# Altium PCB PCB1.PcbDoc
Units mm, origin at the board's own origin, x right, y up, seen from the top; angles counter-clockwise.
Board outline 70.74 x 78.23 mm, 2 copper layers (Top Layer, Bottom Layer); 37 components, 32 nets, 166 pads, 23 vias.
Unrouted connection lines stored in the file: 7.
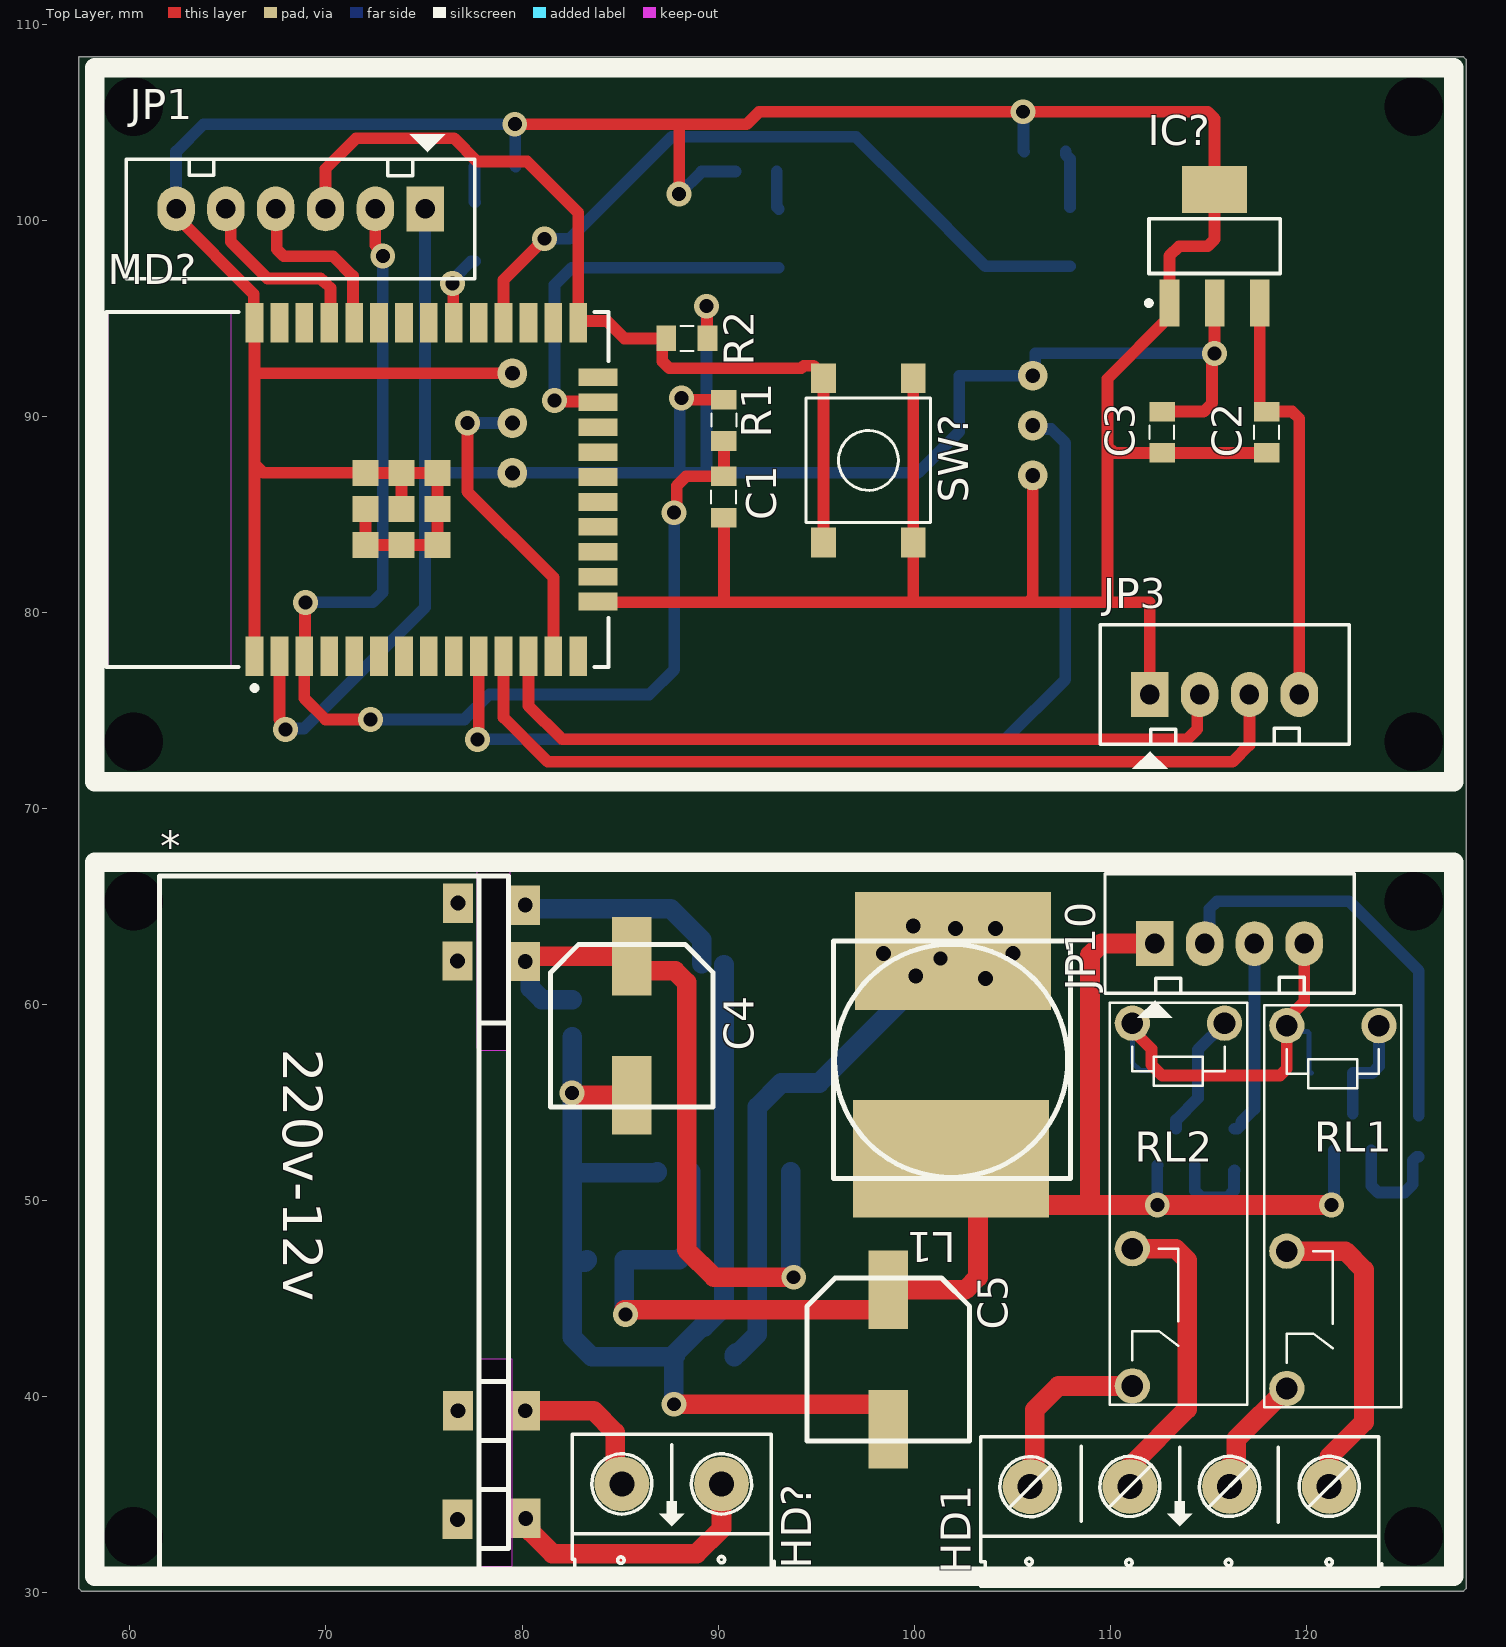
[diagram p0: Top Layer view]
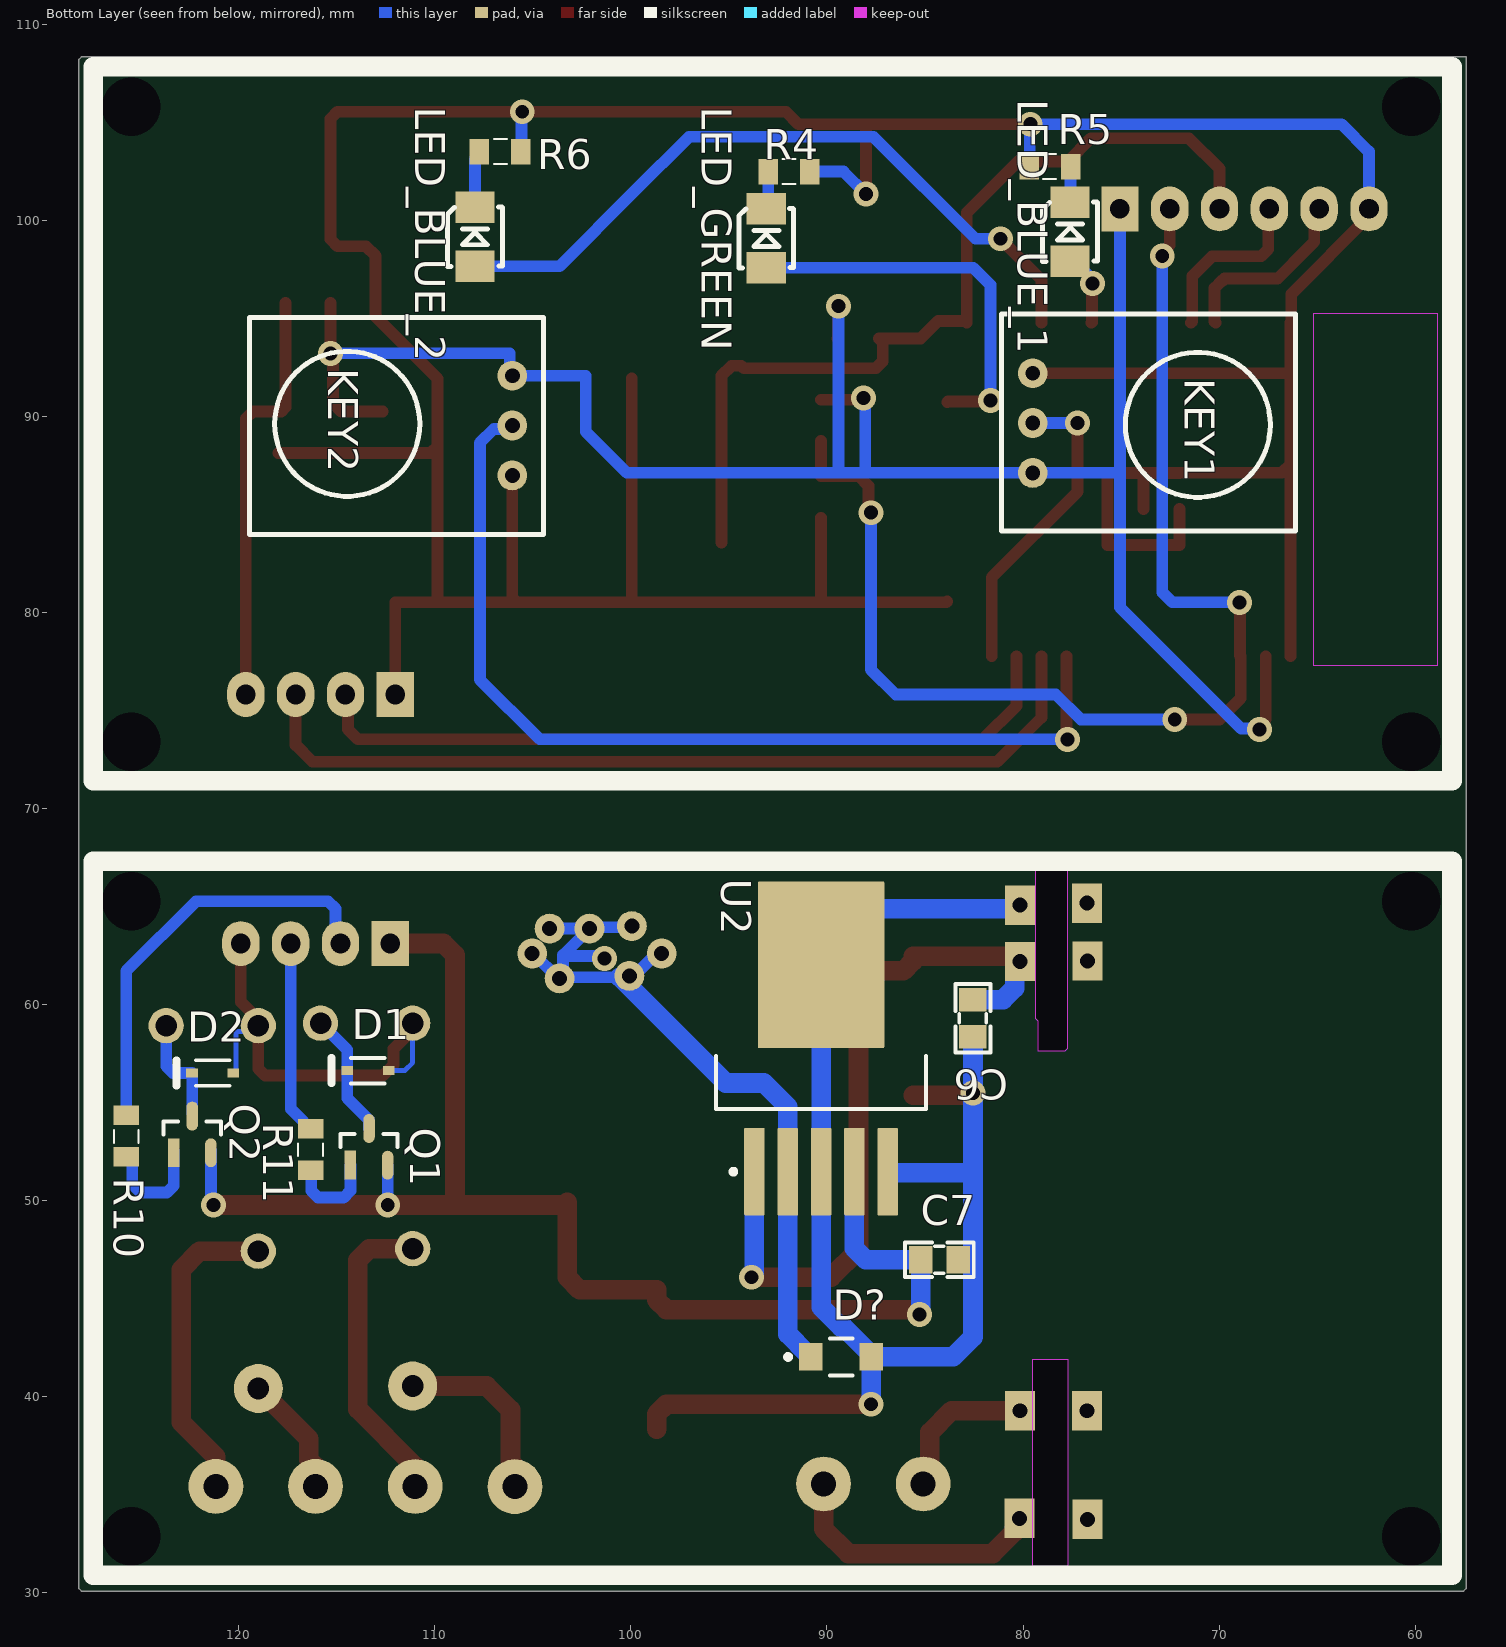
[diagram p1: Bottom Layer view, seen from below]
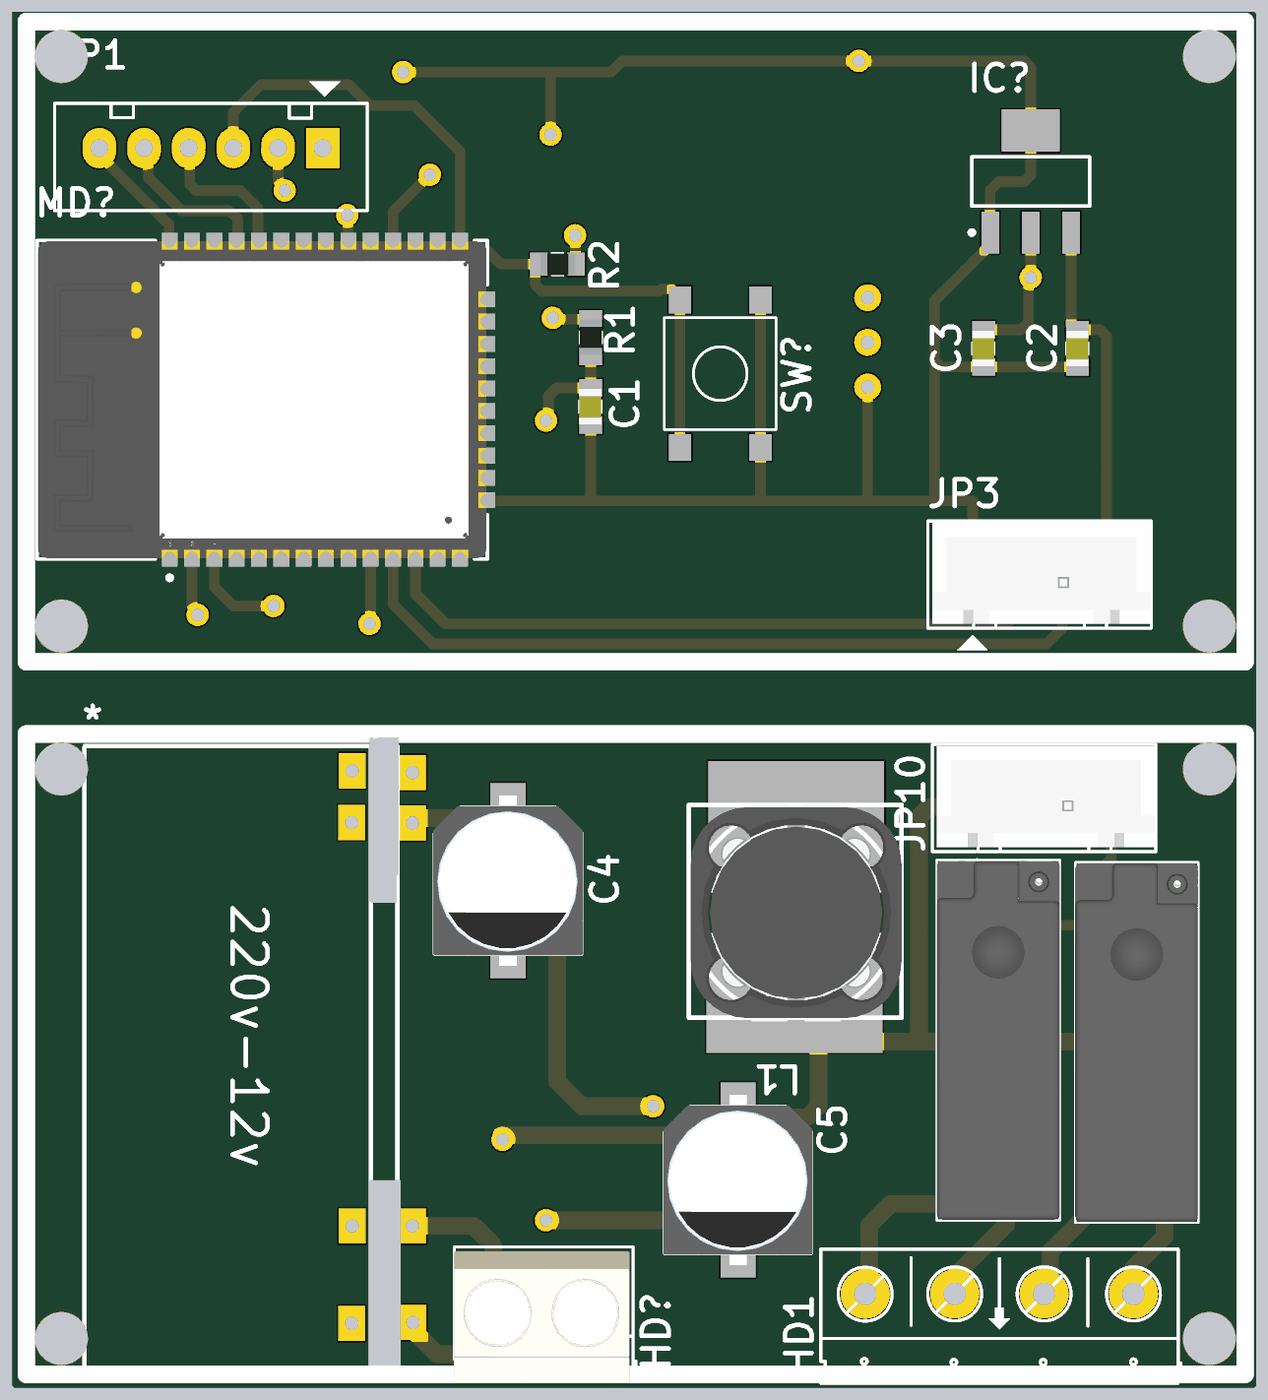
[diagram p2: 3D render of the assembled board from above, using the file's embedded part models]
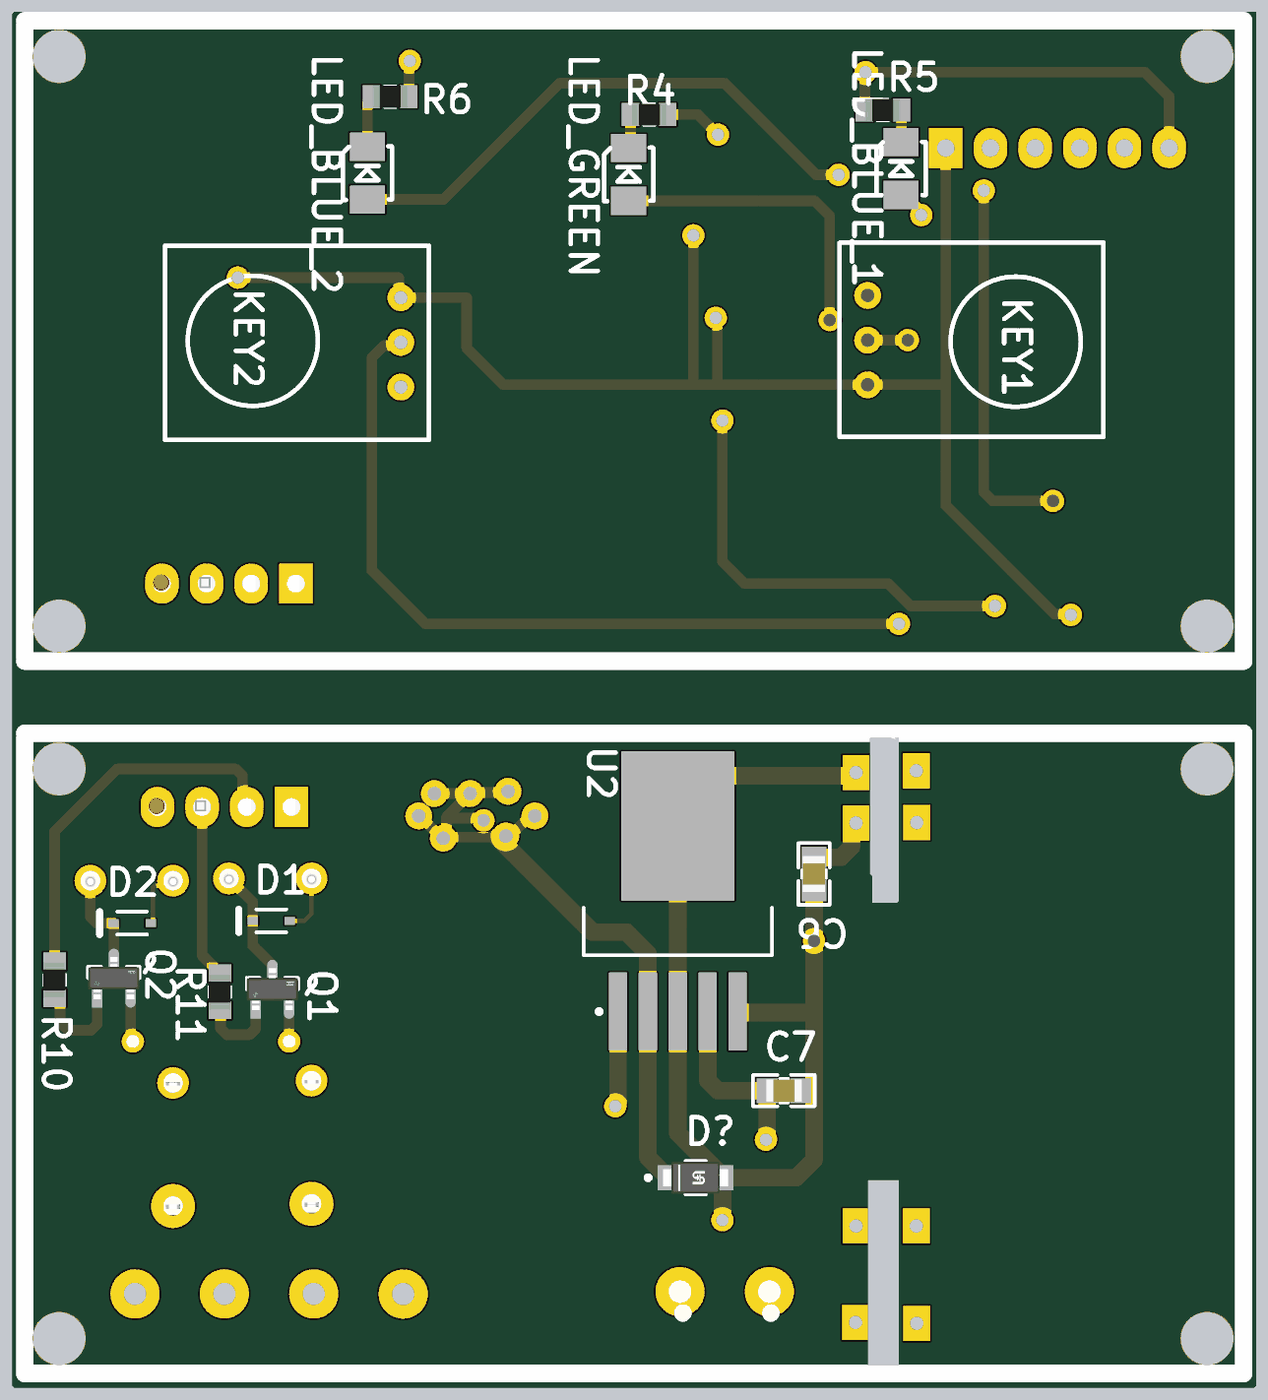
[diagram p3: 3D render of the assembled board from below, using the file's embedded part models]

## Layer stack, top to bottom
Top Solder: solder mask 0.0102, Solder Resist, Dk 3.5
Top Layer: signal copper 0.0356
Dielectric 1: dielectric 0.32, FR-4, Dk 4.8
Bottom Layer: signal copper 0.0356
Bottom Solder: solder mask 0.0102, Solder Resist, Dk 3.5

## Board outline
57.404,30.226 57.531,30.099 128.016,30.099 128.143,30.226 128.143,108.204 128.016,108.331 57.404,108.331
cut-out: 77.851,66.929 77.978,67.056 79.375,67.056 79.375,59.309 79.248,59.182 79.248,57.658 77.851,57.658 77.724,57.785 77.724,67.056 78.232,67.056
cut-out: 77.724,41.91 77.724,31.369 79.502,31.369 79.502,41.91

## Design rules (kind name [scope] priority, off if disabled: settings)
Clearance [All] p1: gap=0.254 ignorepadtopadclearanceinfootprint=FALSE except(0: Arc-Hole Track-Hole SMDPad-Hole THPad-Hole Via-Hole Fill-Hole Poly-Hole Region-Hole Text-Hole)
PolygonConnect [All] p1: connectstyle=Relief reliefconductorwidth=0.254 reliefentries=4 polygonreliefangle="90 Angle" airgapwidth=0.254
RoutingVias [All] p1: holewidth=0.711 width=1.27 viastyle="Through Hole" minholewidth=0.711 minwidth=1.27 maxholewidth=0.711 maxwidth=1.27
SolderMaskExpansion [All] p1: expansion=0.102 istentingtop=FALSE
Width [All] p1: maxlimit=1 minlimit=0.254 preferedwidth=0.6
30 further rules are at their usual default settings.

## Classes and differential pairs
component class Mat_tren: C1 C2 C3 IC? JP1 JP3 KEY1 KEY2 LED_BLUE_1 LED_BLUE_2 LED_GREEN MD? R1 R2 R4 R5 R6 SW?
component class Mat_Duoi: * C4 C5 C6 C7 D1 D2 D? HD1 HD? JP10 L1 Q1 Q2 R10 R11 RL1 RL2 U2

## Components (designator, comment, footprint, x,y, rotation, side; value= is the part's Value field where it differs from the comment)
* "MODULE_NGUON" NGUON_220_12 77.724,66.599 r270 top
C1 "1uF" CM-0805 90.297,85.877 r90 top value=103
C2 "104" CM-0805 117.983,89.179 r90 top value=103
C3 "104" CM-0805 112.649,89.179 r90 top value=103
C4 "470uF" "tu nhom 8 (f)" 85.598,58.928 r270 top
C5 "470uF" "tu nhom 8 (f)" 98.679,41.91 r270 top
C6 "104" "tu 0805" 82.55,59.309 r270 bottom
C7 "104" "tu 0805" 84.266,46.993 r180 bottom
D1 "1N4148WS-7-F" DIOD-SOD323-2-A_V 113.411,56.642 r0 bottom
D2 "1N4148WS-7-F" DIOD-SOD323-2-A_V 121.324,56.515 r0 bottom
D? "SS34LWHRVG" FP-SS34LWH-MFG 89.281,42.037 r180 bottom
HD1 "Header 4" HED4 121.16,35.435 r180 top
HD? "Header 2" HED2 90.17,35.56 r180 top
IC? "LM1117" SOT223-4N 115.316,98.679 r90 top value=LM317
JP1 "JP6" CON6 75.057,100.584 r180 top value="Connector 6"
JP3 "JP4" CON4 112.014,75.819 r0 top value="Connector 4"
JP10 "JP4" CON4 112.268,63.119 r0 top value="Connector 4"
KEY1 "Component_1" test 81.169,95.186 r180 bottom
KEY2 "Component_1" test 104.378,84.01 r0 bottom
L1 "100uH - 3A SMD" "Cuon Cam 12x12x10" 95.881,51.138 r0 top
LED_BLUE_1 "LED" LED_SMD 77.597,97.917 r90 bottom value="LED 3 ly Single Colour"
LED_BLUE_2 "LED" LED_SMD 107.95,97.663 r90 bottom value="LED 3 ly Single Colour"
LED_GREEN "LED" LED_SMD 93.091,97.584 r90 bottom value="LED 3 ly Single Colour"
MD? "ESP32-WROOM-32" FP-ESP32-WROOM-32-MFG 71.617,86.274 r90 top
Q1 "MMSS8550-H-TP" FP-SOT-23-IPC_B 113.35,52.751 r90 bottom
Q2 "MMSS8550-H-TP" FP-SOT-23-IPC_B 122.367,53.386 r90 bottom
R1 "10k" RM-0805 90.297,89.789 r90 top value="R1/4W - 1K"
R2 "10k" RM-0805 88.392,93.98 r0 top value="R1/4W - 1K"
R4 "1k" RM-0805 91.948,102.489 r180 bottom value="R1/4W - 1K"
R5 "1k" RM-0805 78.613,102.743 r0 bottom value="R1/4W - 1K"
R6 "1k" RM-0805 106.68,103.505 r180 bottom value="R1/4W - 1K"
R10 "1k" RM-0805 125.73,53.315 r270 bottom value="R1/4W - 1K"
R11 "1k" RM-0805 116.332,52.629 r270 bottom value="R1/4W - 1K"
RL1 "Relay" HF46F 118.998,58.928 r270 top value="Relay SPDT, 10A, 12V"
RL2 "Relay" HF46F 111.124,59.055 r270 top value="Relay SPDT, 10A, 12V"
SW? "SW" SW4_SMD 97.663,87.757 r270 top value="Button chip 4 pin"
U2 "LM2596S-3.3/NOPB" KTT0005B_M 90.297,57.785 r90 bottom

## Footprints (in the part's own frame and the unit in brackets; to place one, negate y for a bottom-side part, rotate by r counter-clockwise, add the part's x,y. Pads: shape width x height; smd on the part's side, far side on the other; paste and mask are expansions set on the pad)
CM-0805 [mm] "Capacitor SMD 80x50mil"
  rect 1x1.3 smd: 1(-1.041,0) 2(1.067,0)
  silkscreen extent -0.33,-0.61 0.36,0.66, body extent -1.01,-0.61 1.01,0.66, height 0.61
CON4 [mm] "CON4 - Header White"
  rect 1.905x2.286 hole 1: 1(0,0)
  oval 1.905x2.286 hole 1: 2(2.54,0) 3(5.08,0) 4(7.62,0)
  silkscreen extent -2.54,-3.8 10.16,3.56, body extent -2.29,-2.29 10.11,3.46, height 7
CON6 [mm] "CON6"
  rect 1.905x2.286 hole 1: 1(0,0)
  oval 1.905x2.286 hole 1: 2(2.54,0) 3(5.08,0) 4(7.62,0) 5(10.16,0) 6(12.7,0)
  silkscreen extent -2.54,-3.8 15.24,3.56
"Cuon Cam 12x12x10" [mm] "Cuon Cam 12x12x10"
  rect 10x6 smd: 1(6.1,11.6) 2(6,1)
  silkscreen extent 0,0 12.1,12.1, body extent 0.1,-0.2 12.1,12.14, height 7.51
DIOD-SOD323-2-A_V [mm] "SOD-323, 2-Leads, Body 1.7x1.3mm"
  rect 0.59x0.45 smd: 1(-1.055,0) 2(1.055,0)
  silkscreen extent -0.85,-0.65 1.85,0.65, body extent -0.85,-0.65 0.85,0.65, height 1.2
FP-ESP32-WROOM-32-MFG [mm]
  rect 2x0.9 smd paste+0 mask+0: 1(-8.5,5.26) 2(-8.5,3.99) 3(-8.5,2.72) 4(-8.5,1.45) 5(-8.5,0.18) 6(-8.5,-1.09) 7(-8.5,-2.36) 8(-8.5,-3.63) 9(-8.5,-4.9) 10(-8.5,-6.17) 11(-8.5,-7.44) 12(-8.5,-8.71) 13(-8.5,-9.98) 14(-8.5,-11.25) 25(8.5,-11.25) 26(8.5,-9.98) 27(8.5,-8.71) 28(8.5,-7.44) 29(8.5,-6.17) 30(8.5,-4.9) 31(8.5,-3.63) 32(8.5,-2.36) 33(8.5,-1.09) 34(8.5,0.18) 35(8.5,1.45) 36(8.5,2.72) 37(8.5,3.99) 38(8.5,5.26)
  rect 0.9x2 smd paste+0 mask+0: 15(-5.715,-12.25) 16(-4.445,-12.25) 17(-3.175,-12.25) 18(-1.905,-12.25) 19(-0.635,-12.25) 20(0.635,-12.25) 21(1.905,-12.25) 22(3.175,-12.25) 23(4.445,-12.25) 24(5.715,-12.25)
  rect 1.33x1.33 smd paste+0 mask+0: 39(-2.835,-2.24) 39(-2.835,-0.405) 39(-2.835,-4.075) 39(-1,-0.405) 39(-1,-4.075) 39(-1,-2.24) 39(0.835,-0.405) 39(0.835,-4.075) 39(0.835,-2.24)
  Keep-Out Layer region: -9,6.45 9,6.45 9,12.75 -9,12.75
  Keep-Out Layer region: -9,6.45 9,6.45 9,12.75 -9,12.75
  silkscreen extent -10.25,-12.8 9.05,12.8, body extent -9.6,-13.35 9.6,12.9, height 0.25
FP-SOT-23-IPC_B [mm]
  rect 1.474x0.585 smd paste+0 mask+0: 1(-0.935,0.95)
  rrect100% 1.474x0.585 smd paste+0 mask+0: 2(-0.935,-0.95) 3(0.935,0)
  silkscreen extent 0,-1.46 0.65,1.46, body extent -1.2,-1.46 1.2,1.46, height 1.25
FP-SS34LWH-MFG [mm]
  rect 1.2x1.4 smd paste+0 mask+0: 1(-1.55,0) 2(1.55,0)
  silkscreen extent -2.83,-0.95 0.58,0.95, body extent -1.85,-0.9 1.85,0.9, height 1.02
HED2 [mil] "Header 2, 2 pin, hight 300mil, Pin to Pin 200, Colour Green"
  round 110 hole 50: 1(0,0) 2(200,0)
  silkscreen extent -106,-100 300,200, body extent -92,-90 302,205, height 394
HED4 [mil] "Header 4, 4 pin, hight 300mil, Pin to Pin 200, Colour Green"
  round 110 hole 50: 1(0,0) 2(200,0) 3(400.06,0.06) 4(600.39,0.39)
  silkscreen extent -106,-100 700,200
HF46F [mm]
  round 1.8 hole 1.1: 1(0,0) 2(0,4.7) 3(11.5,0)
  round 1.8 / inner round 1.8 / far side round 2.5 hole 1.1: 4(18.5,0)
  silkscreen extent -1.05,-1.15 19.45,5.85, body extent -1,-1.15 19.4,5.85, height 15.59
KTT0005B_M [mm] "DPAK, 5-Leads, Body 10.65x9.65mm, Pitch 1.7mm, IPC Low Density"
  rrect10% 4.45x1.05 smd: 1(-6.3,3.4) 2(-6.3,1.7) 3(-6.3,0) 4(-6.3,-1.7) 5(-6.3,-3.4)
  rrect2% 8.5x6.45 smd: 6(4.25,0)
  silkscreen extent -6.42,-5.35 -0.4,5.35, body extent -3.1,-5.32 6.55,5.33, height 4.83
LED_SMD [mm]
  rect 1.6x2 smd: 1(0,0) 2(3,0)
  silkscreen extent -0.03,-1.4 3.02,1.4
NGUON_220_12 [mil]
  rect 78.74x60 hole 30: 1(56,-39) 1(60,96) 2(172,-40) 2(173,96) 3(1075,-39) 3(1075,96) 4(1291,97) 4(1293,-40)
  silkscreen extent 1,-638 1410,62
RM-0805 [mm] "Resistor SMD 80x50mil"
  rect 1x1.3 smd: 1(-1.041,0) 2(1.067,0)
  silkscreen extent -0.3,-0.64 0.36,0.64, body extent -0.97,-0.64 1.03,0.62, height 0.58
SOT223-4N [mm] "SOT223, 4-Leads, Body 6.5x3.5mm, Pitch 2.3mm, Lead Span 7mm, IPC Medium Density"
  rect 2.4x1 smd: 1(-2.9,2.3) 2(-2.9,0) 3(-2.9,-2.3)
  rect 2.4x3.3 smd: 4(2.9,0)
  silkscreen extent -3.02,-3.35 1.4,3.47, body extent -1.85,-3.35 1.85,3.35, height 1.8
SW4_SMD [mil] "SW SMD button 4pin, 250 x250 mil"
  rect 60x50 smd: 1(-165,90) 2(165,-90) 3(165,90) 4(-165,-90)
  silkscreen extent -125,-125 125,125, body extent -180,-125 180,125, height 130
test [mil]
  round 60 hole 30: 1(65.63,-317.5) 2(65.63,-217.5) 3(65.63,-117.5)
  silkscreen extent 3,-434 594,1
"tu 0805" [mm] "Compoment SMD 80x50mil"
  rect 1.2x1.4 smd: 1(-0.946,-0.003) 2(0.954,-0.003)
  silkscreen extent -1.75,-0.89 1.75,0.89, body extent -1.01,-0.64 1.01,0.63, height 0.61
"tu nhom 8 (f)" [mm]
  rect 4x2 smd: 1(-3.55,0) 2(3.55,0)
  silkscreen extent -4.15,-4.15 4.15,4.15, body extent -4.85,-4.25 4.85,4.25, height 10.5

## Part data
C1 C2 C3: library part CM, "Cap SMD"
C4 C5: library part "Tu Nhom 470uF 16V", "Dán", Chung_Loai=Dán, Don_Vi=Con, Ma_Hang=MH001940, So_Chan=2, Ten_Linh_Kien="Tụ Nhôm 470uF 16V 8x10.4MM"
C6 C7: library part "Tu 0805 104 50V 10%", "Dán", Chung_Loai=Dán, Don_Vi=Con, Ma_Hang=MH004551, So_Chan=2, Ten_Linh_Kien="Tụ 0805 104-100nF 10% 50V"
D1 D2: library part CMP-1667-00004-1, "Fast Switching Diode, 75 V, 0.3 A, -65 to 150 degC, 2-Pin SOD323, RoHS, Tape and Reel", ComponentLink1Description="Manufacturer URL", ComponentLink1URL=http://www.diodes.com/, ComponentLink2Description=Datasheet, ComponentLink2URL=http://www.diodes.com/datasheets/ds30097.pdf, DatasheetVersion="Rev. 25-2, 03/2016", PackageDescription="2-Pin Small Outline Diode, Body 1.7 x 1.3 mm", PackageReference=SOD323-2
D?: library part CMP-15604-000001-1, "DIODE SCHOTTKY 40V 3A SOD123W", RoHS Compliant=Yes
HD1: library part Hed4, "Header 4 (Green)"
HD?: library part Hed2, "Header 2 (Green)"
IC?: "3v3"
JP1: library part Con6, "Connector 6"
JP3 JP10: library part Con4, "Connector 4"
L1: library part "CUON CAM 100uH SMD", "Dán", Chung_Loai=Dán, Don_Vi=Con, Ten_Linh_Kien="Cuộn Cảm 100uH 7x7x4MM CD74"
LED_BLUE_1 LED_BLUE_2 LED_GREEN: "LED Single colour Green and Red"
MD?: library part CMP-194065-000008-1, "RX TXRX MOD WIFI SURFACE MOUNT", Case/Package=SMD/SMT, Frequency=2.5GHz, Max Operating Temperature=85°C, Min Operating Temperature=-40°C, Operating Supply Voltage=3.6V, Package Quantity=550, Data Rate=150Mbps, Mount="Surface Mount", Packaging="Cut Tape", Sensitivity=-98dBm, Weight=0.088185oz
Q1 Q2: library part CMP-56214-000002-1, "TRANS PNP 25V 1.5A SOT23", Case/Package=SOT-23, Collector Base Voltage (VCBO)=40V, Collector Emitter Breakdown Voltage=25V, Collector Emitter Saturation Voltage=500mV, Emitter Base Voltage (VEBO)=1.6V, Max Collector Current=1.5A, Max Operating Temperature=150°C, Max Power Dissipation=625mW, Min Operating Temperature=-55°C, Package Quantity=1, Transition Frequency=100MHz, Collector Emitter Voltage (VCEO)=500mV, Element Configuration=Single, Gain Bandwidth Product=100MHz, hFE Min=40, Lead Free="Lead Free", Max Breakdown Voltage=25V, Mount="Surface Mount", Packaging="Tape and Reel", Polarity=PNP
R1 R2 R4 R5 R6 R10 R11: library part R, "Resistor 1/4W"
RL1 RL2: library part "Relay SPST-NO", "Relay SPDT 4 Pin, HF161F-W or G4A-1A-PE"
SW?: library part SW4, "Switch button 4 pin"
U2: library part CMP-0069-00275-3, "SIMPLE SWITCHER® Power Converter 150 KHz 3A Step-Down Voltage Regulator, 5-pin TO-263, Pb-Free", Manufacturer="Texas Instruments", PackageTopMarking="NSUZXYTTE#*LM2596S*-3.3 P+", PowerWise=N, Code_JEDEC=MO-169-AB, ComponentLink1Description="Datasheet URL", ComponentLink1URL=http://www.ti.com/general/docs/lit/getliterature.tsp?genericPartNumber=LM2596&fileType=pdf, CompType=Switcher, PackageDescription="TO-263, Molded, .400 x .390 x .180in, 5 Lead, .067in Pitch, Surface Mount", PackageReference=KTT0005B, PinCount=5, RoHS=Y

## Free pads (board coordinates)
  round 1.524 hole 3: 31(60.198,32.893) 31(60.198,65.278) 31(60.198,73.406) 31(60.198,105.791) 31(125.476,32.893) 31(125.476,65.278) 31(125.476,73.406) 31(125.476,105.791)
  round 1.524 hole 0.762: 32(99.949,64.008) 33(102.108,63.881) 34(104.14,63.881) 35(105.029,62.611) 36(103.632,61.341) 37(100.076,61.468) 38(98.425,62.611)

## Via types
v1: diameter 1.27, hole 0.711, Top Layer to Bottom Layer, 23 vias

## Nets (pads, with @x,y where several pads share a name; then routed paths per layer and width w, separated by ;. In a path a pad name is that pad's centre, name@x,y a point inside that pad or via, vN(x,y) a via of type N, cw(c..) or ccw(c..) an arc to the next point about the centre after c; other vN are vias at no path point)
3.3V: C3.2 IC?.2 JP1.1 KEY1.1 KEY2.1 MD?.2 R1.2 R2.2 | length 102.5
  Top Layer w0.6: v1@67.627,74.54 MD?.2 ; v1(88.138,90.932) 88.214,90.856 R1.2 ; v1(89.408,95.62) 89.433,95.595 89.433,94.005 R2.2 ; C3.2 114.757,90.246 115.189,90.678 115.189,93.091 v1(115.316,93.218) IC?.2
  Bottom Layer w0.6: v1(67.945,74.041) 67.986,74.082 68.875,74.082 75.057,80.264 75.057,87.249 ; JP1.1 75.057,87.249 ; 88.041,87.122 88.041,90.835 v1(88.138,90.932) ; v1(89.408,95.62) 89.408,87.249 89.535,87.122 ; v1(115.316,93.218) 106.172,93.218 106.172,92.202 KEY2.1 102.298,92.075 102.298,89.218 100.203,87.122 89.535,87.122 ; 75.057,87.249 75.184,87.122 KEY1.1 87.66,87.122 88.519,87.122 89.535,87.122
5V: C2.2 C5.1 C7.1 IC?.3 JP3.4 JP10.1 L1.2 Q1.2 Q2.2 U2.4 | length 94.9
  Top Layer w0.6: IC?.3 117.616,90.463 117.833,90.246 119.283,90.246 119.634,89.895 JP3.4
  Top Layer w1: v1@85.217,44.45 98.179,44.45 98.679,44.95 C5.1 102.61,45.46 103.251,46.101 103.251,49.911 103.378,49.784 108.966,49.784 ; JP10.1 109.552,63.119 108.966,62.533 108.966,49.784 ; v1(121.285,49.784) v1(112.395,49.784) 108.966,49.784
  Bottom Layer w0.6: v1(112.395,49.784) 112.397,49.786 112.397,51.814 Q1.2 ; v1(121.285,49.784) 121.404,49.903 121.404,52.57 Q2.2@121.412,52.578
  Bottom Layer w1: v1(85.282,44.199) 85.282,44.272 85.215,44.34 85.215,46.987 C7.1 88.011,46.99 88.597,47.576 U2.4 ; JP10.1@111.816,62.543 112.268,62.995 JP10.1
+12: *.2 C4.1 C6.1 U2.1 | length 37.6
  Top Layer w1: *.2@80.424,62.478 C4.1 85.598,62.222 86.098,61.722 87.806,61.722 88.392,61.136 88.392,47.498 89.789,46.101 v1(93.853,46.101)
  Bottom Layer w1: *.2@80.162,62.205 80.424,61.943 80.424,60.84 81.01,60.255 C6.1 ; U2.1 93.697,46.33 93.853,46.174 v1(93.853,46.101)
\: JP10.3 R11.1 | length 10
  Bottom Layer w0.6: R11.1 116.482,53.67 116.682,53.87 116.682,54.02 117.348,54.686 JP10.3
BTN1: KEY1.2 MD?.13 | length 16
  Top Layer w0.6: v1(77.216,89.662) 77.216,86.168 81.597,81.787 MD?.13
  Bottom Layer w0.6: v1(77.216,89.662) KEY1.2
BTN2: KEY2.2 MD?.10 | length 49.6
  Top Layer w0.6: v1(77.724,73.533) 77.787,73.596 MD?.10
  Bottom Layer w0.6: v1(77.724,73.533) 104.648,73.533 107.696,76.581 107.696,88.646 106.984,89.358 106.222,89.358 KEY2.2
COM_1: HD1.1 RL1.3 | length 15.1
  Top Layer w1: RL1.3 121.99,47.428 122.936,46.482 122.936,38.712 121.158,36.934 HD1.1@121.158,36.449
COM_2: HD1.3 RL2.3 | length 14.8
  Top Layer w1: HD1.3@110.996,36.447 113.919,39.37 113.919,46.969 113.333,47.555 RL2.3
EN: C1.2 JP1.2 MD?.3 R1.1 | length 63
  Top Layer w0.6: v1(68.961,80.518) 68.929,80.486 68.929,77.806 MD?.3 68.897,75.629 69.977,74.549 v1(72.263,74.549) ; JP1.2 72.517,98.733 72.898,98.352 v1(72.898,98.171) ; v1(87.757,85.09) 87.885,85.218 87.885,86.467 88.362,86.944 C1.2 R1.1
  Bottom Layer w0.6: v1(68.961,80.518) 72.39,80.518 72.898,81.026 v1(72.898,98.171) ; v1(72.263,74.549) 77.059,74.549 78.329,75.819 86.487,75.819 87.757,77.089 v1(87.757,85.09)
FLASH: JP1.3 MD?.25 R2.1 SW?.2 SW?.4 | length 46.1
  Top Layer w0.6: JP1.3 69.977,102.627 71.536,104.186 76.535,104.186 77.724,102.997 80.264,102.997 82.867,100.394 MD?.25 82.962,94.869 84.328,94.869 85.217,93.98 R2.1 87.151,93.78 87.151,92.807 87.502,92.456 94.234,92.456 94.366,92.588 94.864,92.588 95.377,92.075 SW?.4 SW?.2
GND: *.1 C1.1 C2.1 C3.1 C4.2 C5.2 C6.2 C7.2 D1.1 D2.1 D?.2 IC?.1 IC?.4 JP1.6 JP3.1 JP10.4 KEY1.3 KEY2.3 MD?.1 MD?.15 MD?.38 MD?.39 R4.2 R5.2 R6.2 RL1.1 RL2.1 SW?.1 SW?.3 U2.3 U2.5 U2.6 | length 316.1
  Top Layer w0.6: JP1.6 62.357,100.203 66.323,96.237 66.323,94.808 MD?.38 66.357,92.329 ; MD?.1 66.357,87.567 ; MD?.39@72.022,85.274 72.022,83.439 73.857,83.439 75.692,83.439 75.692,85.274 75.692,87.109 MD?.39@73.857,87.109 ; MD?.39@73.857,85.274 MD?.39@73.857,87.109 ; KEY1.3 66.484,92.202 66.357,92.329 ; v1@79.81,104.902 87.884,104.902 ; MD?.15 83.908,80.518 90.297,80.518 ; v1(88.011,101.346) 88.011,104.775 87.884,104.902 ; C1.1 90.297,80.518 ; SW?.1 SW?.3 99.949,80.518 ; KEY2.3 106.045,80.757 105.806,80.518 ; RL2.1 111.124,58.73 112.098,57.757 112.098,56.939 112.649,56.388 118.647,56.388 118.998,56.739 RL1.1 118.998,59.253 119.888,60.143 JP10.4 ; JP3.1 112.014,80.518 109.855,80.518 ; C2.1 C3.1 110.206,88.138 109.855,88.489 ; 66.357,87.567 66.357,92.329 ; 66.357,87.567 66.802,87.122 72.009,87.122 72.022,87.109 MD?.39@73.857,87.109 ; 87.884,104.902 91.452,104.902 92.087,105.537 v1(105.537,105.537) 114.965,105.537 115.316,105.186 IC?.4 115.316,99.03 114.965,98.679 113.508,98.679 113.016,98.187 IC?.1 113.016,95.079 109.855,91.918 109.855,88.489 ; 90.297,80.518 99.949,80.518 ; 99.949,80.518 105.806,80.518 ; 105.806,80.518 109.855,80.518 ; 109.855,80.518 109.855,88.489
  Top Layer w1: v1(82.55,55.499) 82.623,55.499 82.744,55.378 C4.2 ; v1(87.757,39.624) 98.179,39.624 98.679,39.124 C5.2
  Bottom Layer w0.254: RL2.1 111.124,57.045 111.527,56.642 D1.1 ; RL1.1 119.294,58.632 120.057,58.632 120.142,58.547 120.142,56.613 120.24,56.515 D2.1
  Bottom Layer w0.6: JP1.6 62.357,103.505 63.754,104.902 v1(79.629,104.902) 79.654,104.877 79.654,102.768 R5.2 ; KEY1.3 KEY1.3@79.527,92.227 ; v1(88.011,101.346) 89.154,102.489 R4.2 ; v1(105.537,105.537) 105.575,105.499 105.575,103.543 R6.2
  Bottom Layer w1: *.1@80.424,64.897 87.572,64.897 89.154,63.315 U2.6@89.154,62.103 ; C6.2 C6.2 82.552,55.501 v1(82.55,55.499) 82.55,51.234 ; C7.2 83.312,46.963 83.212,46.863 82.55,46.863 ; U2.5 86.897,51.46 86.872,51.435 82.751,51.435 82.55,51.234 ; v1(87.757,39.624) 87.744,39.637 87.744,42.024 D?.2 ; U2.6 U2.3 90.297,44.577 89.281,43.561 89.155,43.561 87.831,42.237 87.831,42.137 D?.2 ; 82.55,46.863 82.55,51.234 ; 82.55,46.863 82.55,43.053 83.566,42.037 D?.2
IR_Pin: MD?.14
LED_OUT1: LED_BLUE_1.1 MD?.30 | length 3.8
  Top Layer w0.6: v1(76.454,96.774) 76.486,96.742 76.486,94.805 MD?.30
  Bottom Layer w0.6: v1(76.454,96.774) 76.582,96.902 76.582,97.102 77.397,97.917 LED_BLUE_1.1
LED_OUT2: LED_BLUE_2.1 MD?.28 | length 36.8
  Top Layer w0.6: MD?.28 79.057,96.964 v1(81.153,99.06)
  Bottom Layer w0.6: v1(81.153,99.06) 82.423,99.06 87.63,104.267 97.028,104.267 99.822,101.473 103.632,97.663 LED_BLUE_2.1
LED_WIFI: LED_GREEN.1 MD?.23 | length 19.9
  Top Layer w0.6: v1(81.661,90.805) 81.704,90.762 83.824,90.762 MD?.23
  Bottom Layer w0.6: v1(81.661,90.805) 81.661,96.712 82.533,97.584 LED_GREEN.1
Net*_3: *.3 HD?.2 | length 7.8
  Top Layer w1: *.3@80.162,39.294 83.642,39.294 84.747,38.189 84.747,35.903 HD?.2
Net*_4: *.4 HD?.1 | length 13.8
  Top Layer w1: *.4@80.188,33.807 80.188,33.569 80.45,33.307 80.45,33.098 81.544,32.004 88.9,32.004 90.17,33.274 HD?.1
NetD1_2: D1.2 Q1.3 RL2.2 | length 6.4
  Bottom Layer w0.6: Q1.3 113.35,54.116 114.466,55.232 D1.2 114.466,57.697 RL2.2
NetD2_2: D2.2 Q2.3 RL1.2 | length 5.6
  Bottom Layer w0.6: Q2.3@122.362,54.448 122.362,56.498 D2.2 123.347,56.515 123.698,56.866 RL1.2
NetD?_1: D?.1 L1.1 pad.32 pad.33 pad.34 pad.35 pad.36 pad.37 pad.38 U2.2 | length 43.9
  Top Layer w0.6: pad.38 98.602,62.434 98.86,62.434 99.826,61.468 pad.37
  Bottom Layer w0.6: pad.38 98.602,62.434 98.86,62.434 99.826,61.468 pad.37 100.139,61.404 100.553,61.404 pad.36@103.569,61.404 ; pad.32 100.013,63.944 102.044,63.944 pad.33 ; v1(101.346,62.357) 101.473,62.484 103.455,62.484 ; pad.34 pad.33 ; pad.35 104.965,62.611 103.695,61.341 pad.36 pad.36@103.569,61.404 ; pad.33 103.455,62.534 103.455,62.484 ; 103.455,62.484 103.455,61.518 pad.36@103.569,61.404
  Bottom Layer w1: D?.1 90.831,42.137 90.931,42.237 91.031,42.237 91.997,43.203 U2.2 91.997,54.786 93.218,56.007 95.155,56.007 pad.37@100.553,61.404
NetLED_BLUE_1_2: LED_BLUE_1.2 R5.1 | length 1.8
  Bottom Layer w0.6: R5.1 77.572,100.942 LED_BLUE_1.2
NetLED_BLUE_2_2: LED_BLUE_2.2 R6.1 | length 2.9
  Bottom Layer w0.6: R6.1 107.721,103.355 107.95,103.126 LED_BLUE_2.2
NetLED_GREEN_2: LED_GREEN.2 R4.1 | length 1.9
  Bottom Layer w0.6: R4.1 92.989,100.686 LED_GREEN.2
NetQ1_1: Q1.1 R11.2 | length 4.7
  Bottom Layer w0.6: Q1.1 114.3,50.516 114.651,50.165 115.951,50.165 116.302,50.516 116.302,51.532 R11.2
NetQ2_1: Q2.1 R10.2 | length 5.8
  Bottom Layer w0.6: Q2.1@123.312,52.578 123.312,50.77 123.663,50.419 124.998,50.419 125.426,50.848 125.426,52.048 125.626,52.248 R10.2
OUT1: JP3.3 MD?.11 | length 45
  Top Layer w0.6: MD?.11 79.057,74.646 81.313,72.39 116.235,72.39 117.094,73.249 JP3.3
OUT1_2: JP10.2 R10.1 | length 21.5
  Bottom Layer w0.6: JP10.2 115.058,63.369 115.058,64.893 115.443,65.278 122.174,65.278 125.73,61.722 R10.1
OUT2: JP3.2 MD?.12 | length 39.4
  Top Layer w0.6: MD?.12 80.327,75.248 82.042,73.533 113.919,73.533 114.427,74.041 114.427,75.692 JP3.2
R_OUT1: HD1.2 RL1.4 | length 5.2
  Top Layer w1: HD1.2@116.078,36.449 116.421,36.792 116.421,37.851 RL1.4
R_OUT2: HD1.4 RL2.4 | length 8.5
  Top Layer w1: HD1.4@105.908,36.439 106.138,36.669 106.138,39.336 107.357,40.555 RL2.4
RX0: JP1.5 MD?.35 | length 9.6
  Top Layer w0.6: JP1.5 65.147,100.334 65.147,98.903 65.498,98.552 67.022,97.028 69.723,97.028 69.85,96.901 69.88,96.901 70.231,96.55 70.231,94.838 MD?.35
TX0: JP1.4 MD?.34 | length 8.9
  Top Layer w0.6: JP1.4 67.494,100.527 67.494,98.522 67.845,98.171 70.358,98.171 71.374,97.155 71.374,94.837 MD?.34
pads on no net: MD?.4 MD?.5 MD?.6 MD?.7 MD?.8 MD?.9 MD?.16 MD?.17 MD?.18 MD?.19 MD?.20 MD?.21 MD?.22 MD?.24 MD?.26 MD?.27 MD?.29 MD?.31 MD?.32 MD?.33 MD?.36 MD?.37

## Silkscreen, mask and mechanical layers (free items; w line width, h text height)
Top Overlay:
  lines w1: 58.208,30.861 127.508,30.861 127.508,67.268 58.208,67.268 58.208,31.022 ; 58.208,71.374 127.508,71.374 127.508,107.781 58.208,107.781 58.208,71.535
Bottom Overlay:
  lines w1: 127.424,67.149 127.424,30.903 58.124,30.903 58.124,67.31 127.424,67.31 ; 127.424,107.662 127.424,71.416 58.124,71.416 58.124,107.823 127.424,107.823
Mechanical 1:
  lines w0.254: 78.669,98.985 cw(c77.666,99.023) 78.669,99.073 ; 93.819,98.985 cw(c92.816,99.023) 93.819,99.073 ; 108.969,99.073 ccw(c107.966,99.023) 108.969,98.985
  lines w1: 58.293,66.294 58.293,71.628 ; 127.466,67.149 127.466,30.903 58.166,30.903 58.166,67.31 127.466,67.31 127.466,71.416 ; 127.466,107.662 127.466,71.416 ; 127.466,107.823 58.166,107.823 58.166,71.416 127.466,71.416

## Text inside footprints (layer, text, board x,y; h text height)
*: Mechanical 1 "220v-12v" at 67.818,57.887 h2 r270; Mechanical 1 "220v-12v" at 67.716,57.76 h2 r270; Top Overlay "220v-12v" at 67.818,57.76 h2 r270